# EAGLE board TypeCConverter (EAGLE 9.0.0)
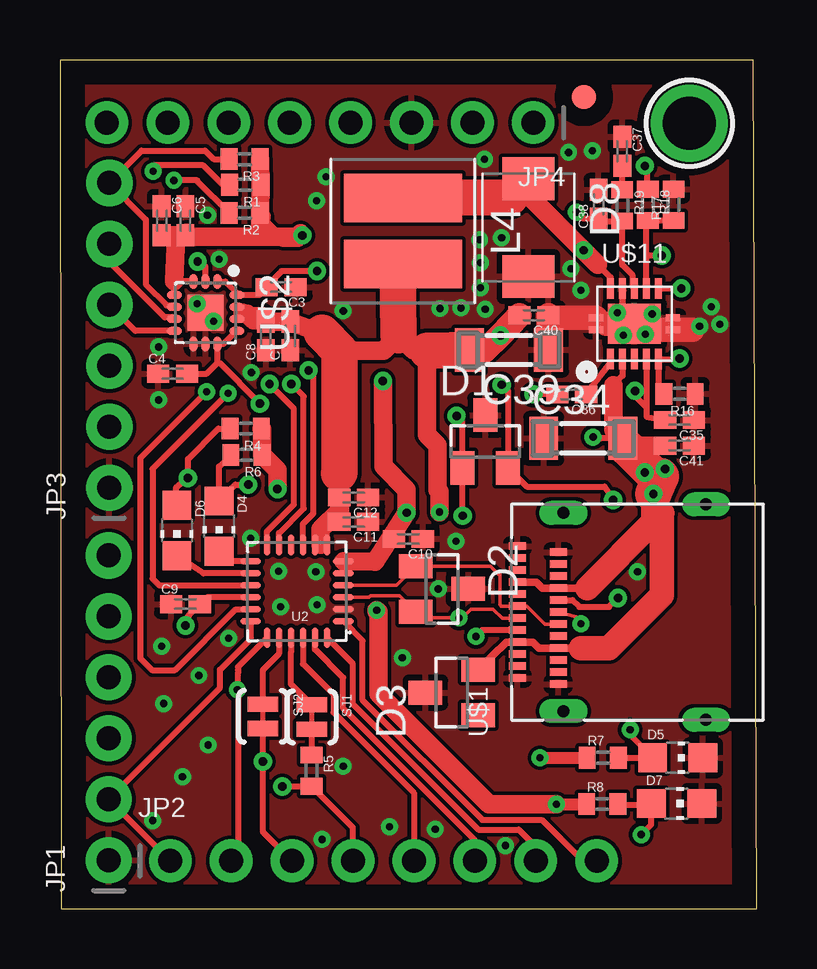
[diagram p0: board, top side]
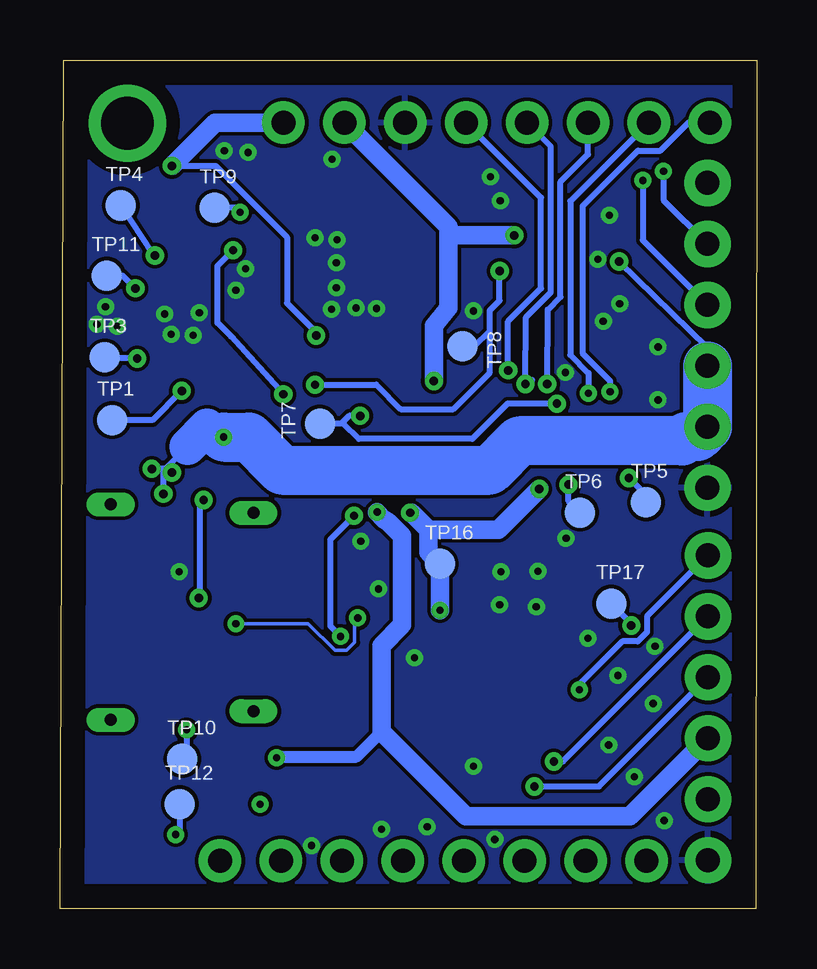
[diagram p1: board, bottom side, seen from below]

Size 29.05 x 35.37 mm. Coordinates in mm from the lower left corner, seen from the top.
Outline: 0.05,0 29.05,0 28.9,35.37 0,35.37 0.05,0
Copper layers (1*16): Top 0.035mm / dielectric 1.5mm / Bottom 0.035mm
Design rules "default *": minimum track width 6mil, minimum drill 0.3mm, track to track 6mil, track to pad 6mil, pad to pad 6mil, via to via 6mil, smd to smd 6mil, copper to edge 40mil, drill to drill 6mil, minimum pad ring 10mil, minimum via ring 8mil, stop-mask expansion 4mil, vias tented up to drill 0mil, thermal gap 10mil

## Footprints (pad centres in the part's own frame; a part is rotated, then mirrored left to right if it is on the bottom)
C0402K = smd 0.925 x 0.74: 1 -0.6,0; 2 0.6,0
SM-1206 = smd 1.2 x 1.8: 1 -1.65,0; 2 1.65,0
SOT23 = smd 1 x 1.4: 1 -0.95,-1.1; 2 0.95,-1.1; 3 0,1.1
CHIP-LED0805 = smd 1.2 x 1.2: A 0,-1.05; C 0,1.05
SMBJ = smd 1.78 x 2.16: A 2.04,0; C -2.03,0
MOUNTINGHOLE_2.0_PLATED = drill 2.2 pad 3: P$1 0,0
1X06_ROUND_76 = drill 1 pad 1.93: 1 -6.35,0; 2 -3.81,0; 3 -1.27,0; 4 1.27,0; 5 3.81,0; 6 6.35,0
1X08_ROUND_70 = drill 1 pad 1.778: 1 -8.89,0; 2 -6.35,0; 3 -3.81,0; 4 -1.27,0; 5 1.27,0; 6 3.81,0; 7 6.35,0; 8 8.89,0
DFN600X600X420-2 = smd 2.012 x 4.912: 1 -1.375,0; 2 1.375,0
R0402 = smd 0.7 x 0.9: 1 -0.65,0; 2 0.65,0
SJ_2S-TRACE = smd 0.635 x 1.27: 1 -0.508,0; 2 0.508,0
B1,27 = smd 1.27 x 1.27: TP 0,0
FIDUCIAL_1MM = smd 1 x 1: 1 0,0
QFN50P400X400X100-24 = smd 0.86 x 0.27: 1 -1.935,1.25; 2 -1.935,0.75; 3 -1.935,0.25; 4 -1.935,-0.25; 5 -1.935,-0.75; 6 -1.935,-1.25; 13 1.935,-1.25; 14 1.935,-0.75; 15 1.935,-0.25; 16 1.935,0.25; 17 1.935,0.75; 18 1.935,1.25 | smd 0.27 x 0.86: 7 -1.25,-1.935; 8 -0.75,-1.935; 9 -0.25,-1.935; 10 0.25,-1.935; 11 0.75,-1.935; 12 1.25,-1.935; 19 1.25,1.935; 20 0.75,1.935; 21 0.25,1.935; 22 -0.25,1.935; 23 -0.75,1.935; 24 -1.25,1.935
TYPECSMT = smd 0.3 x 0.7: A1 -2.75,5.74; A2 -2.25,5.74; A3 -1.75,5.74; A4 -1.25,5.74; A5 -0.75,5.74; A6 -0.25,5.74; A7 0.25,5.74; A8 0.75,5.74; A9 1.25,5.74; A10 1.75,5.74; A11 2.25,5.74; A12 2.75,5.74; B1 2.5,4.04; B2 2,4.04; B3 1.5,4.04; B4 1,4.04; B5 0.5,4.04; B6 0,4.04; B7 -0.5,4.04; B8 -1,4.04; B9 -1.5,4.04; B10 -2,4.04; B11 -2.5,4.04; B12 -3,4.04 | drill 0.5 pad 0.8 long: SH1 -4.13,3.83; SH2 -4.49,-2.12; SH3 4.49,-2.12; SH4 4.13,3.83
QFN50P250X250X80-15T150 = smd 0.612 x 0.332: 1 -1.3,0.5; 2 -1.3,0; 3 -1.3,-0.5; 8 1.3,-0.5; 9 1.3,0; 10 1.3,0.5 | smd 0.332 x 0.612: 4 -0.75,-1.3; 5 -0.25,-1.3; 6 0.25,-1.3; 7 0.75,-1.3; 11 0.75,1.3; 12 0.25,1.3; 13 -0.25,1.3; 14 -0.75,1.3 | smd 1.5 x 1.5: 15 0,0
VSON10 = smd 0.3 x 0.85: 1 -1,-1.475; 2 -0.5,-1.475; 3 0,-1.475; 4 0.5,-1.475; 5 1,-1.475; 6 1,1.475; 7 0.5,1.475; 8 0,1.475; 9 -0.5,1.475; 10 -1,1.475 | smd 2.2 x 1.65: 11 0,0 | smd 0.6 x 0.28: 12 1.6,-0.25; 13 1.6,0.25; 14 -1.6,0.25; 15 -1.6,-0.25

## Placement (x,y rotation side)
C3  500pF  [C0402K]  9.22,25.91 180 top
C4  500pF  [C0402K]  4.7,22.3 0 top
C5  1uF  [C0402K]  5.23,28.68 270 top
C6  100nF  [C0402K]  4.24,28.68 270 top
C7  10uF  [C0402K]  9.6,23.88 90 top
C8  100nF  [C0402K]  8.59,23.88 90 top
C9  10uF  [C0402K]  5.23,12.7 0 top
C10  10uF  [C0402K]  14.53,15.42 180 top
C11  10uF  [C0402K]  12.24,16.13 180 top
C12  100nF  [C0402K]  12.24,17.14 180 top
C34  2.2uF  [SM-1206]  21.82,19.61 0 top
C35  0.01uF  [C0402K]  25.83,20.37 180 top
C36  0.1uF  [C0402K]  21.34,21.44 180 top
C37  2.7nF  [C0402K]  23.44,31.57 270 top
C38  6.8pF  [C0402K]  22.45,29.36 90 top
C39  47uF  [SM-1206]  18.72,23.29 180 top
C40  100nF  [C0402K]  19.76,24.74 180 top
C41  0.1uF  [C0402K]  25.83,19.3 180 top
D1  PESD1CAN  [SOT23]  17.73,19.48 0 top
D2  PESD1CAN  [SOT23]  15.93,13.34 270 top
D3  PESD1CAN  [SOT23]  16.33,9.02 90 top
D4  LED  [CHIP-LED0805]  6.63,15.95 180 top
D5  LED  [CHIP-LED0805]  25.76,6.3 270 top
D6  LED  [CHIP-LED0805]  4.88,15.77 180 top
D7  LED  [CHIP-LED0805]  25.7,4.39 270 top
D8  DIODESMB  [SMBJ]  19.53,28.4 270 top
GND  MOUNTINGHOLE2.0  [MOUNTINGHOLE_2.0_PLATED]  26.24,32.74 0 top
JP1  FTDI  [1X06_ROUND_76]  2.03,8.38 90 top
JP2  Modem  [1X08_ROUND_70]  13.49,2.01 0 top
JP3  PowerDelivery  [1X06_ROUND_76]  2.06,23.9 90 top
JP4  Control  [1X08_ROUND_70]  10.85,32.77 180 top
L4  10uH  [DFN600X600X420-2]  14.3,28.24 270 top
R1  4k7  [R0402]  7.72,30.18 180 top
R2  4k7  [R0402]  7.7,29.01 180 top
R3  4k7  [R0402]  7.7,31.24 180 top
R4  4k7  [R0402]  7.75,20.02 180 top
R5  4k7  [R0402]  10.49,5.77 270 top
R6  4k7  [R0402]  7.77,18.92 180 top
R7  4k7  [R0402]  22.63,6.3 0 top
R8  4k7  [R0402]  22.61,4.37 0 top
R16  90.9k  [R0402]  25.83,21.46 180 top
R17  [R0402]  25.58,29.34 90 top
R18  [R0402]  24.51,29.34 270 top
R19  76.8k  [R0402]  23.44,29.31 270 top
SJ1  [SJ_2S-TRACE]  10.49,8 270 top
SJ2  [SJ_2S-TRACE]  8.46,8.03 270 top
TP1  CP_RESET  [B1,27]  26.87,20.37 0 bottom
TP2  FIDUCIAL  [FIDUCIAL_1MM]  21.84,33.83 0 top
TP3  CP_RESET  [B1,27]  27.18,22.99 0 bottom
TP4  CP_RESET  [B1,27]  26.52,29.31 0 bottom
TP5  CP_RESET  [B1,27]  4.62,16.94 0 bottom
TP6  CP_RESET  [B1,27]  7.37,16.51 0 bottom
TP7  CP_RESET  [B1,27]  18.21,20.22 90 bottom
TP8  CP_RESET  [B1,27]  12.27,23.44 270 bottom
TP9  CP_RESET  [B1,27]  22.61,29.21 0 bottom
TP10  CP_RESET  [B1,27]  23.95,6.25 0 bottom
TP11  CP_RESET  [B1,27]  27.1,26.39 0 bottom
TP12  CP_RESET  [B1,27]  24.05,4.37 0 bottom
TP16  CP_RESET  [B1,27]  13.21,14.38 0 bottom
TP17  VPP  [B1,27]  6.07,12.73 0 bottom
U2  CP2104  [QFN50P400X400X100-24]  9.88,13.23 180 top
U$1  USB-TYPE-CTYPEC_SMT  [TYPECSMT]  24.82,12.37 90 top
U$2  FUSB302BMPX  [QFN50P250X250X80-15T150]  6.07,24.84 270 top
U$11  TPS57140QDRCRQ1  [VSON10]  23.95,24.38 0 top

## Library data of the parts
C3-C12 C34-C41 = capacitor
D1-D3 = diode
D4-D7 = LED
D8 = Diode
GND = microbuilder; BOM: EXCLUDE
JP1-JP4 = microbuilder
L4 = Inductor
R1-R8 R16-R19 = resistor
SJ1 SJ2 = SparkFun-Retired
TP1 TP3-TP12 TP16 TP17 = testpad
TP2 = adafruit
U2 = CP2104
U$1 = lio
U$2 = PDController
U$11 = PMIC

## Nets
3V45LEDWP: D7.A R8.2 TP12.TP
5V: C7.2 C8.2 C11.2 C12.2 C39.2 C40.2 JP1.3 JP4.1 L4.2 R7.1 R18.1 U2.7 U2.8 U$2.12 U$2.13
5VLEDWP: D5.A R7.2 TP10.TP
/INT: JP3.6 R3.2 U$2.5
/SUSPEND: JP4.7 U2.15
BOOT: C36.1 U$11.1
CC1: C4.2 D1.1 TP7.TP U$1.A5 U$2.10 U$2.11
CC2: C3.2 D1.2 TP8.TP U$1.B5 U$2.1 U$2.14
CLK: R16.2 TP3.TP U$11.5
COMP: C38.1 R19.2 TP9.TP U$11.8
COMP_S: C37.2 R19.1
CP_RESET: JP4.4 U2.9
CP_RX: SJ2.1 U2.20
CP_TX: SJ1.1 U2.21
CP_VDD_3V45: C5.2 C6.2 C10.2 JP4.2 R1.1 R2.1 R3.1 R4.1 R6.1 R8.1 TP16.TP U2.5 U2.6 U$2.3 U$2.4
CTS: JP1.2 JP2.1 U2.18
DCD: JP2.7 U2.24
DSR: JP2.5 U2.22
DTR: JP2.6 U2.23
EN: U$11.3
GND: C3.1 C4.1 C5.1 C6.1 C7.1 C8.1 C9.1 C10.1 C11.1 C12.1 C34.1 C35.1 C37.1 C38.2 C39.1 C40.1 C41.1 D1.3 D2.3 D3.3 D5.C D7.C D8.A JP1.1 JP3.1 JP4.3 R16.1 R17.2 U2.2 U$1.A1 U$1.A12 U$1.B1 U$1.B12 U$2.8 U$2.9 U$2.15 U$11.9 U$11.11 U$11.12 U$11.13 U$11.14 U$11.15
GPIO2: JP4.6 U2.12
GPIO3: JP4.5 U2.11
L1: C36.2 D8.C L4.1 U$11.10
N$1: R5.1 SJ1.2
PGOOD: TP11.TP U$11.6
RI: JP2.8 U2.1
RTS: JP1.6 JP2.2 U2.19
RX_LED: D4.C U2.13
RXD: JP1.5 JP2.3 SJ2.2
RXLEDWP: D4.A R6.2 TP6.TP
SCL: JP3.5 R1.2 U$2.6
SDA: JP3.4 R2.2 U$2.7
SS/TR: C35.2 TP1.TP U$11.4
SUSPEND: JP4.8 U2.17
TX_LED: D6.C U2.14
TXD: JP1.4 JP2.4 R5.2
TXLEDWP: D6.A R4.2 TP5.TP
USB_N: D2.1 U2.4 U$1.A7 U$1.B7
USB_P: D2.2 U2.3 U$1.A6 U$1.B6
VBUS: C34.2 C41.2 D3.2 JP3.2 JP3.3 U$1.A4 U$1.A9 U$1.B4 U$1.B9 U$2.2 U$11.2
VPP: C9.2 TP17.TP U2.16
VSNS: R17.1 R18.2 TP4.TP U$11.7

## Tracks (layer width: path | path; a pad name or v marks a point on that pad's centre or on a via)
3V45LEDWP  (via drill 0.3)
  Top 0.254: v24.23,3.1 24.65,3.52 24.65,4.34 | 24.65,4.34 D7.A | R8.2 23.28,4.34 24.65,4.34
  Bottom 0.254: TP12.TP 24.05,3.28 v24.23,3.1
5V  (via drill 0.3, 0.35)
  Top 0.254: U$2.12 7.6,24.59 7.85,24.84 7.62,24.84 U$2.13 | R18.1 24.49,30.01 24.49,30.86 v24.38,30.96 | U2.8 10.87,15.17 U2.7 | C12.2 11.66,17.16 11.66,18.19
  Top 0.508: 9.55,24.53 C8.2 8.5,24.84 7.85,24.84 | 9.55,24.53 C7.2 | 9.56,24.54 9.55,24.53 | 11.66,18.19 11.66,16.78 11.67,17.02 | v20.01,6.3 R7.1
  Top 0.762: 10.92,24 10.91,23.99 C7.2 C8.2 8.06,24.53 7.8,24.79 7.67,24.79 7.62,24.84 | C11.2 11.67,16.61 | 11.67,16.61 11.67,17.02 C12.2 | 11.67,16.61 10.87,15.81 10.87,15.17 | v15.82,16.54 15.82,17.38 15.75,17.46 15.75,19.31 15.31,19.75 15.31,23.26 15.32,23.27 | 11.66,23.27 13.49,23.27 14.12,23.9 14.74,23.28 16.35,23.28
  Top 1.016: C40.2 v18.37,23.9 17.69,23.27 C39.2
  Top 1.524: C39.2 16.35,23.28 15.32,23.27 | 10.92,24 11.66,23.27 11.66,18.19 11.63,18.16 | L4.2 14.07,26.82 14.12,23.9
  Bottom 0.254: v24.38,30.96 22.55,30.96 19.58,27.99 19.58,25.25 18.44,24.1 | 18.39,24.05 18.44,24.1 | 18.44,24.1 v18.37,23.9
  Bottom 0.508: 15.65,9.4 15.65,10.97 | v20.01,6.3 19.96,6.35 16.69,6.35 15.65,7.39
  Bottom 0.762: JP4.1 22.58,32.77 v24.38,30.96 | JP1.3 5.28,3.86 12.12,3.86 15.65,7.39 15.65,10.97 14.78,11.84 14.78,15.55 15.36,16.13 15.57,16.23 v15.82,16.54
5VLEDWP  (via drill 0.3)
  Top 0.254: R7.2 D5.A 23.77,7.23 v23.77,7.47
  Bottom 0.254: v23.77,7.47 23.77,6.43 TP10.TP
/INT
  Top 0.254: U$2.5 4.72,25.15 4.45,25.15 3.58,26.01 3.58,28.73 JP3.6 3.4,31.6 6.04,31.6 6.4,31.24 R3.2 6.96,31.19
/SUSPEND  (via drill 0.3)
  Top 0.254: v7.02,21.49 3.86,18.33 3.86,13.76 4.14,13.48 U2.15
  Bottom 0.254: JP4.7 7.77,29.49 7.77,23.09 7.02,22.33 v7.02,21.49
BOOT
  Top 0.254: C36.1 22.95,22.76 U$11.1
CC1  (via drill 0.3, 0.35)
  Top 0.254: U$2.11 6.82,23.54 U$2.10 6.57,22.75 | C4.2 6.12,22.3 6.57,22.75 | 6.57,22.75 6.65,22.75 v8.33,21.07 v8.33,21.06 | U$1.A5 17.61,11.62 v17.35,11.35 | v16.79,16.38 D1.1 16.78,20.3 v16.54,20.55
  Bottom 0.254: v16.79,16.38 17.78,15.39 17.78,11.78 v17.35,11.35 | v8.33,21.06 10.39,21.06 11.86,19.58 16.59,19.58 17.22,20.22 17.32,20.22 | 17.32,20.22 TP7.TP | v16.54,20.55 16.99,20.55 17.32,20.22
CC2  (via drill 0.35)
  Top 0.254: U$2.14 7.44,25.59 | 7.44,25.59 8.3,25.59 C3.2 8.67,26.02 9.24,26.58 v10.72,26.58 | U$2.1 6.89,26.14 7.44,25.59 | U$1.B5 21.37,12.87 21.65,12.58 22.89,12.58 v23.27,12.95 | v23.06,17.04 22.71,17.6 19.46,17.6 D1.2 18.68,21.58 v18.41,21.84
  Bottom 0.254: 11.12,24.08 11.12,22.35 12.65,20.83 14.84,20.83 15.86,21.84 v18.41,21.84 | 11.12,24.08 11.12,24.94 10.72,25.35 v10.72,26.58 | v23.27,12.95 23.22,13.01 23.22,17.09 v23.06,17.04 | TP8.TP 11.76,23.44 11.12,24.08
CLK  (via drill 0.35)
  Top 0.254: R16.2 24.95,21.69 U$11.5 25.6,22.91 25.81,22.91 v25.83,22.94
  Bottom 0.254: v25.83,22.94 27.13,22.94 TP3.TP
COMP  (via drill 0.3)
  Top 0.254: U$11.8 23.88,25.93 23.88,26.4 23.44,26.84 R19.2 22.55,28.66 C38.1 21.81,28.76 v21.54,29.03
  Bottom 0.254: v21.54,29.03 21.72,29.21 TP9.TP
COMP_S
  Top 0.254: R19.1 C37.2
CP_RESET  (via drill 0.35)
  Top 0.254: U2.9 10.13,16.05 10.57,16.48 10.57,22.22 v10.37,22.44
  Bottom 0.254: v10.37,22.44 10.37,24.48 8.99,25.86 8.99,29.64 JP4.4
CP_RX
  Top 0.254: U2.20 9.13,10.63 8.46,9.96 8.46,9.42 8.46,8.79 SJ2.1
CP_TX
  Top 0.254: U2.21 9.63,10.69 9.63,9.37 SJ1.1
CP_VDD_3V45  (via drill 0.3, 0.35)
  Top 0.152: C10.2 12.99,14.48 U2.6
  Top 0.254: U$2.4 4.77,26.16 | 4.77,26.16 | U$2.3 5.55,26.16 4.77,26.16 | U2.5 U2.6
  Top 0.508: v20.7,4.37 R8.1
  Top 0.762: C6.2 4.8,28.08 | 4.8,28.08 C5.2 | 5.28,28.18 C5.2 | 4.77,26.16 4.85,28.03 4.8,28.08 | U2.6 13.14,14.46 v14.45,16.51 14.45,17.48 13.49,18.44 v13.46,22 | 10.06,28.12 10.02,28.15 9.88,28.01 8.89,28.01 | 10.06,28.12 v10.11,28.07 | R4.1 8.42,19.99 R6.1 9.07,18.28 v9.07,17.5 | C5.2 5.45,28.01 8.51,28.01 | 9.32,27.98 9.92,27.98 10.06,28.12 | R2.1 8.41,28.84 | 8.51,28.01 8.89,28.01 | R2.1 R1.1 R3.1 | R2.1 8.35,28.18 8.51,28.01 | R2.1 8.35,28.56 8.89,28.01 | v20.7,4.37 17.88,4.37 13.28,8.97 13.28,12.37 | 13.28,12.37 13.24,12.37 13.21,12.41 | v13.21,12.45 13.28,12.37
  Bottom 0.254: v14.45,16.51
  Bottom 0.762: v9.07,17.5 10.77,15.8 13.69,15.8 | v13.21,12.45 TP16.TP 13.69,14.86 13.69,15.8 | 12.85,28.19 12.85,25.04 13.46,24.31 v13.46,22 | 12.85,28.19 12.85,28.42 JP4.2 | v10.11,28.07 12.72,28.07 12.85,28.19 | v14.45,16.51 14.4,16.51 13.69,15.8
CTS
  Top 0.254: U2.18 7.95,11.25 6.67,9.97 6.67,9.21 JP1.2 JP2.1
DCD
  Top 0.254: JP2.7 19.84,2.59 19.13,3.3 17.44,3.3 12.22,8.52 12.22,10.21 U2.24
DSR
  Top 0.254: JP2.5 14.76,4.83 11.4,8.19 11.4,8.94 10.13,10.22 U2.22
DTR
  Top 0.254: JP2.6 17.3,2.87 11.81,8.36 11.81,9.64 10.63,10.82 U2.23
GND  (via drill 0.3)
  Top 0.254: U$11.9 23.45,25.05 v23.24,24.84
  Top 1.016: 22.78,24.38 U$11.11 24.2,24.13 U$11.12 26.36,24.13 | C39.1 20.36,23.27 C40.1 20.47,24.63 U$11.14
  other vias: 24.69,24.79 24.41,23.95 23.49,23.9 6.4,24.49 5.71,25.22 7.98,22.35 6.15,28.91 11.81,24.92 15.77,13.34 4.24,10.95 4.11,23.42 6.63,27.08 14.27,10.46 9.19,12.6 9.12,14.07 10.67,14.05 10.72,12.67 16.51,15.32 6.17,6.83 5.11,5.51 3.86,3.68 4.32,8.56 5.79,9.73 7.04,11.28 21.72,25.78 21.31,26.67 18.41,27.97 17.5,27.89 17.53,26.92 17.53,25.88 17.73,24.99 16.71,25.04 15.85,25.02 26.67,24.28 27.15,25.1 27.51,24.36 13.74,3.43 15.65,3.33 11.81,5.94 10.92,2.9 7.95,15.44 4.11,21.21 10.69,29.51 11.1,30.51 17.7,31.24 21.21,31.52 22.2,31.6 18.57,2.64 24.08,14.05
  pour Bottom (isolate 0.152): 0.3,35.2 0.3,0.33 28.68,0.33 28.68,35.2
  pour Top (isolate 0.152): 0.3,35.2 0.3,0.33 28.4,0.3 28.4,35.18
GPIO2  (via drill 0.35)
  Top 0.254: U2.12 8.63,15.73 9.75,16.86 9.75,20.84 8.99,21.6 8.99,21.62 v8.74,21.88
  Bottom 0.254: v8.74,21.88 8.71,24.97 8.18,25.5 8.18,30.3 7.04,31.45 JP4.6
GPIO3  (via drill 0.35)
  Top 0.254: U2.11 9.13,15.66 10.16,16.69 10.16,21.36 v9.65,21.88
  Bottom 0.254: 9.37,22.05 9.45,22.05 v9.65,21.88 9.62,24.66 8.58,25.69 8.58,31.77 JP4.5
L1  (via drill 0.35)
  Top 0.254: U$11.10 22.95,26.32 22.43,26.85 | C36.2 19.78,21.44 v19.74,21.45
  Top 0.762: 22.43,26.85 v21.83,27.45 19.53,29.74 D8.C
  Top 1.524: L4.1 18.75,29.64 D8.C
  Bottom 0.254: v19.74,21.45 21.92,23.86 22.48,24.42 22.48,26.8 v21.83,27.45
N$1
  Top 0.254: SJ1.2 R5.1
PGOOD  (via drill 0.35)
  Top 0.254: U$11.6 v25.91,25.86
  Bottom 0.254: TP11.TP 26.44,26.39 v25.91,25.86
RI
  Top 0.254: JP2.8 21.79,2.01 20.09,3.71 17.61,3.71 12.62,8.69 12.62,11.18 U2.1
RTS  (via drill 0.3)
  Top 0.254: U2.19 7.42,10.09 7.42,9.96 7.42,9.83 7.42,9.16 | JP2.2 7.42,2.29 7.42,9.16 | v7.4,9.14 7.42,9.16
  Bottom 0.254: v7.4,9.14 7.4,9.37 5.61,11.15 4.96,11.15 4.57,11.54 4.57,12.19 JP1.6
RX_LED
  Top 0.254: U2.13 6.97,14.48 D4.C
RXD  (via drill 0.35)
  Top 0.254: SJ2.2 v8.46,6.15 8.46,3.23 JP2.3
  Bottom 0.254: JP1.5 8.08,6.15 v8.46,6.15
RXLEDWP  (via drill 0.35)
  Top 0.254: R6.2 6.63,18.43 D4.A 7.31,17.68 v7.85,17.68
  Bottom 0.254: TP6.TP 7.85,16.99 v7.85,17.68
SCL  (via drill 0.3)
  Top 0.254: U$2.6 4.72,24.65 4.37,24.65 2.06,26.96 JP3.5 | R1.2 6.86,30.1 5.97,30.99 3.91,30.99 v3.89,30.74
  Bottom 0.254: v3.89,30.74 3.89,29.54 JP3.5
SDA  (via drill 0.3)
  Top 0.254: U$2.7 3.14,24.09 JP3.4 | v4.75,30.36 5.72,30.36 5.72,30.33 R2.2
  Bottom 0.254: v4.75,30.36 4.75,27.86 JP3.4
SS/TR  (via drill 0.35)
  Top 0.254: U$11.4 24.45,20.9 | 24.45,20.9 24.45,20.52 C35.2 | 24.45,20.9 23.9,21.45 23.9,21.46 23.97,21.54 v23.97,21.59
  Bottom 0.254: v23.97,21.59 25.19,20.37 TP1.TP
SUSPEND  (via drill 0.3)
  Top 0.254: v6.11,21.55 3.35,18.78 3.35,10.44 3.84,9.96 4.8,9.96 7.33,12.48 U2.17
  Bottom 0.254: JP4.8 2.84,32.77 4.01,31.6 4.95,31.6 7.26,29.29 7.26,23.16 6.11,22.01 v6.11,21.55
TX_LED
  Top 0.254: U2.14 5.97,13.98 D6.C
TXD  (via drill 0.35)
  Top 0.254: JP2.4 12.22,3.39 R5.2 v9.28,5.12 v9.27,5.11
  Bottom 0.254: 9.14,4.95 v9.27,5.11 6.58,5.11 JP1.4
TXLEDWP  (via drill 0.35)
  Top 0.254: D6.A 4.85,17.58 v5.33,17.96 5.33,18.75 6.6,20.02 R4.2
  Bottom 0.254: TP5.TP 4.63,17 4.63,17.25 v5.33,17.96
USB_N
  Top 0.152: 18.34,13.97 18.34,13.89 | 18.34,13.89 18.34,12.68 18.39,12.62 U$1.A7 | 18.83,12.62 U$1.A7 | U$1.A7 19.46,12.62 20.22,11.86 20.77,11.86 U$1.B7 | 18.34,13.89 17.95,14.29 D2.1 14.02,13.48 U2.4
USB_P  (via drill 0.3)
  Top 0.152: 15.22,12.12 D2.2 | U$1.B6 21.84,12.09 v21.72,11.89 | D2.2 15.41,12.13 v16.64,12.13 16.77,12.13 17.14,12.5 18.06,12.5 18.44,12.12 U$1.A6 | U2.3 12.88,12.98 12.96,13.06 14.15,13.06 D2.2
  Bottom 0.152: v16.64,12.13 16.77,12 16.77,11.11 17.11,10.77 17.59,10.77 18.7,11.89 v21.72,11.89
VBUS  (via drill 0.3, 0.35)
  Top 0.254: U$11.2 23.45,22.21 23.06,21.82 | U$2.2 6.07,26.77 v5.74,26.98 | v24.38,18.19 24.55,18.02 25.06,18.02 25.06,18.18 v25.22,18.34 | 25.09,16.48 24.74,16.13 | C34.2 22.53,19.61 v22.23,19.66
  Top 0.305: U$1.A9 19.86,13.62 20.12,13.36 20.77,13.36 U$1.B4 21.98,13.37 22,13.39 | D3.2 18.61,11.12 U$1.A4 19.72,11.12 19.97,10.87 U$1.B9 21.71,10.87
  Top 0.762: 23.06,21.82 23.06,19.96 C34.2 23.72,19.3 C41.2
  Top 1.016: 25.12,16.48 25.09,16.48 25.09,13.08 22.89,10.87 21.71,10.87 | 21.98,13.37 24.74,16.13 v24.74,17.3
  Top 1.524: v24.74,17.3 25.06,18.02 24.82,18.02 23.63,19.21
  Bottom 0.254: v5.74,26.98 2.06,23.39 JP3.3 | 23.74,19.27 24.66,18.34 | 24.66,18.34 v25.22,18.34 | 24.66,18.34 24.74,18.26 v24.74,17.3 | 22.91,20.09 v22.23,19.66
  Bottom 1.524: 22.91,20.09 23.74,19.27
  Bottom 2.032: v22.23,19.66 21.18,19.66 19.8,18.29 11.12,18.29 9.91,19.51 3.12,19.51 2.94,19.68 2.46,19.68 JP3.2 | JP3.3 JP3.2 | JP3.2 2.26,19.89
VPP  (via drill 0.35)
  Top 0.254: v5.23,11.81 5.31,12.15 5.37,12.21 5.37,12.24 C9.2 6.12,12.98 U2.16
  Bottom 0.254: v5.23,11.81 5.31,11.96 TP17.TP
VSNS  (via drill 0.35)
  Top 0.254: U$11.7 24.45,27.23 | 24.45,27.23 24.45,28.63 R18.2 R17.1 | 24.45,27.23 v25.09,27.23
  Bottom 0.254: TP4.TP 25.2,27.33 v25.09,27.23